# Allegro board asq1_button.brd
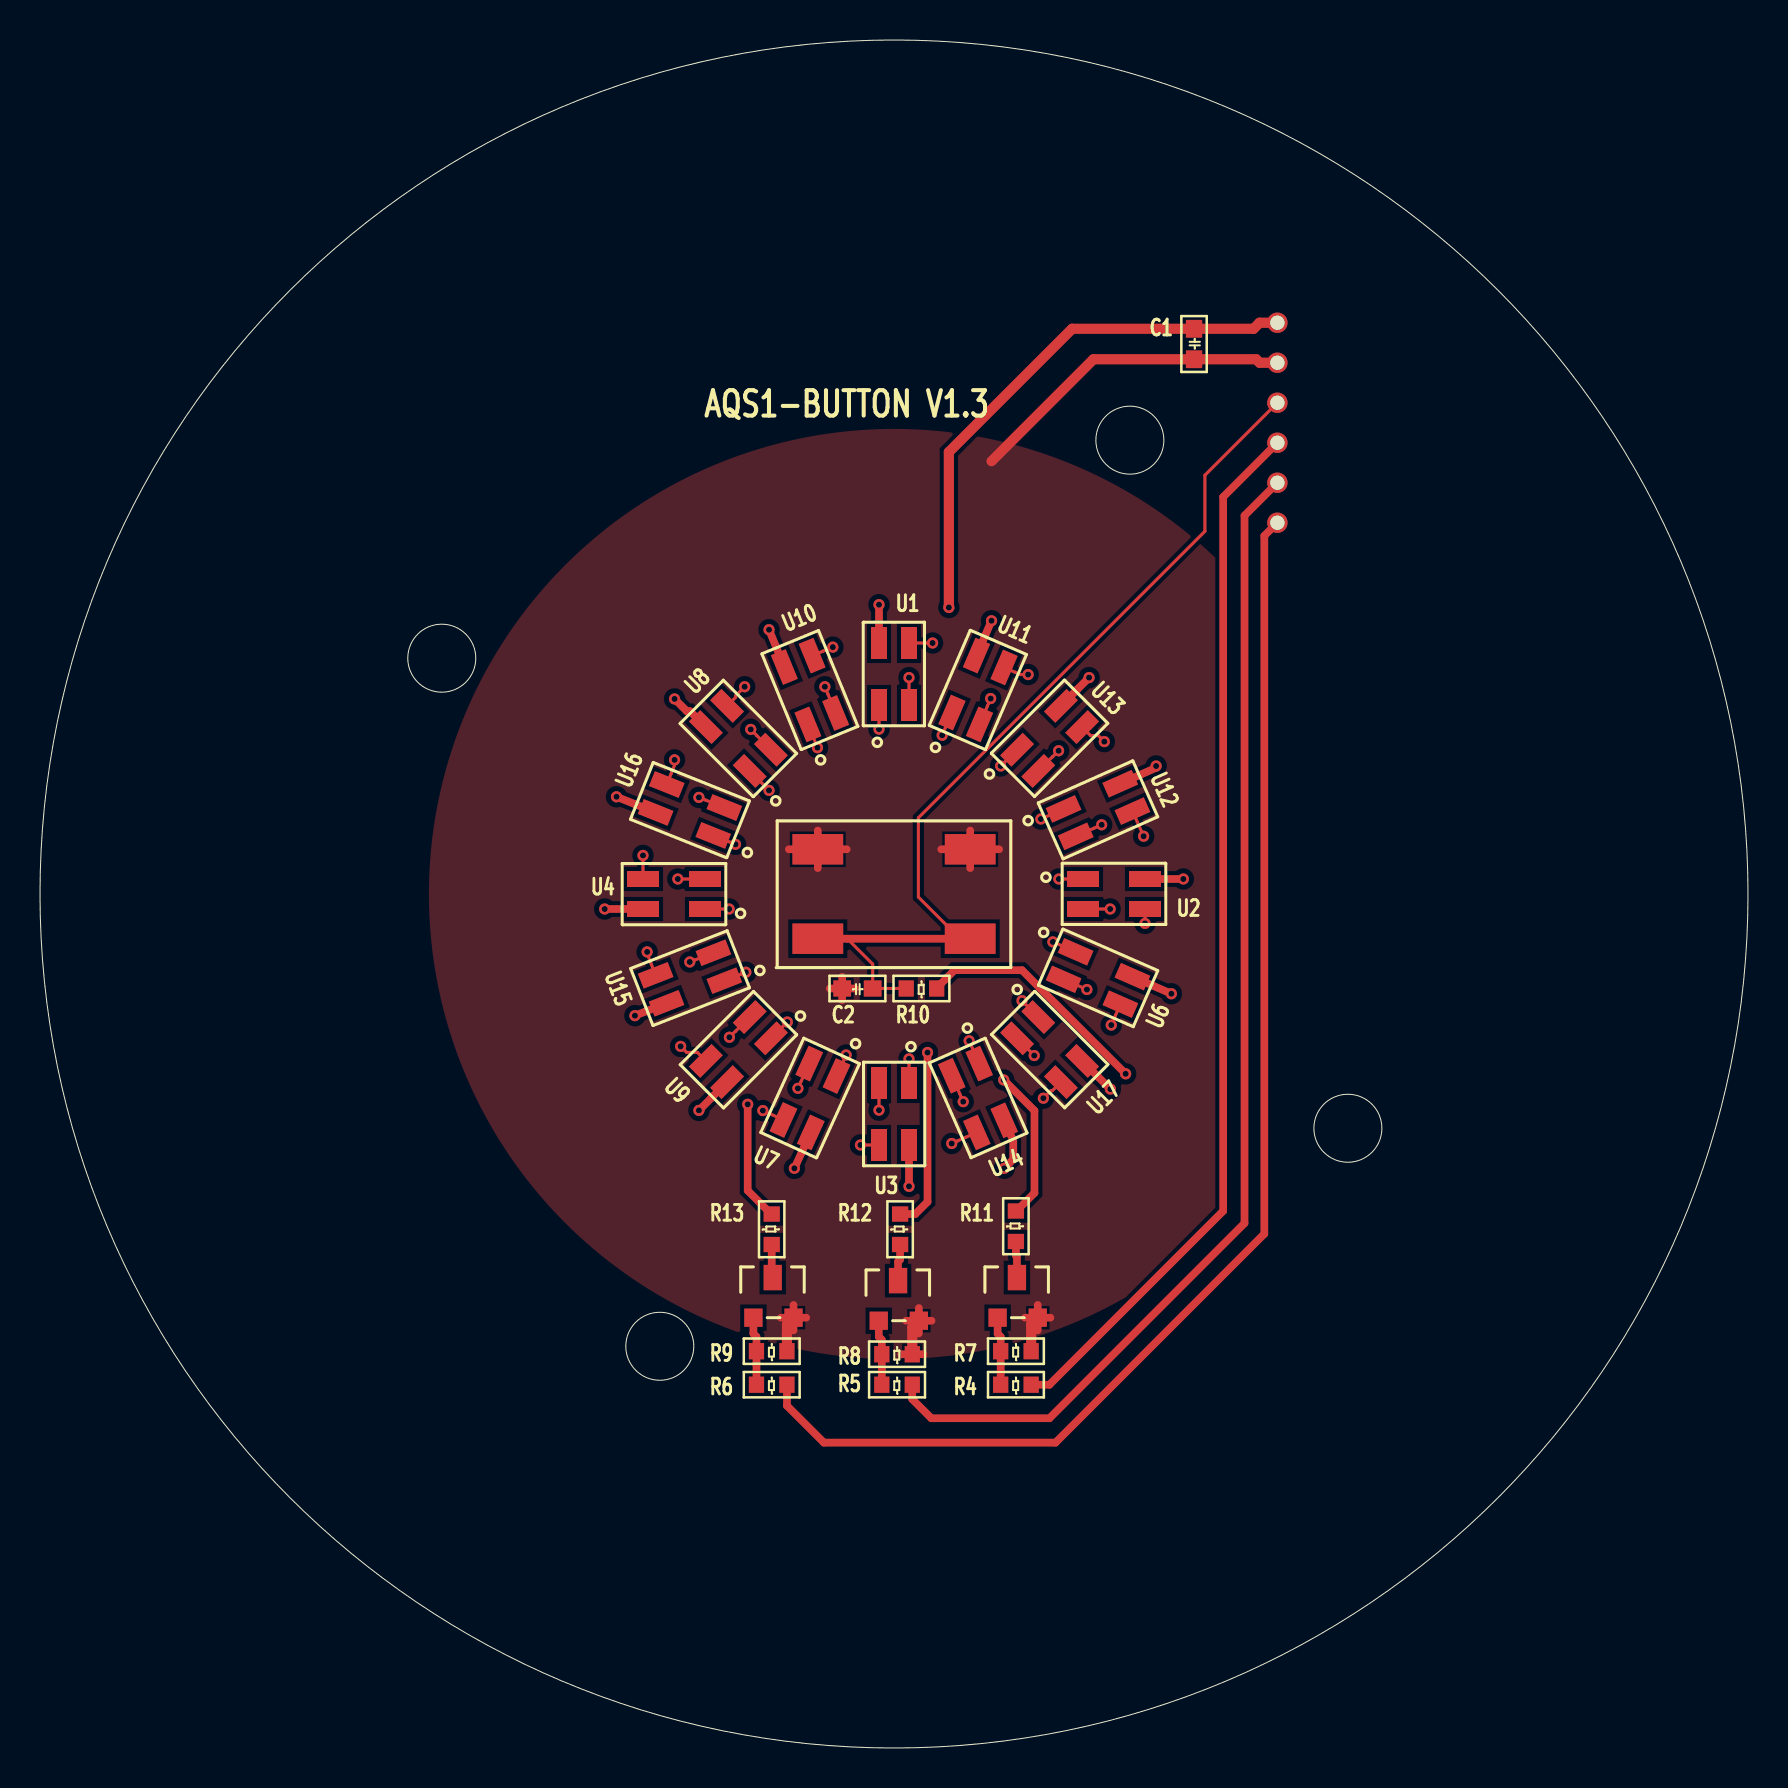
[diagram p0: board, top side]
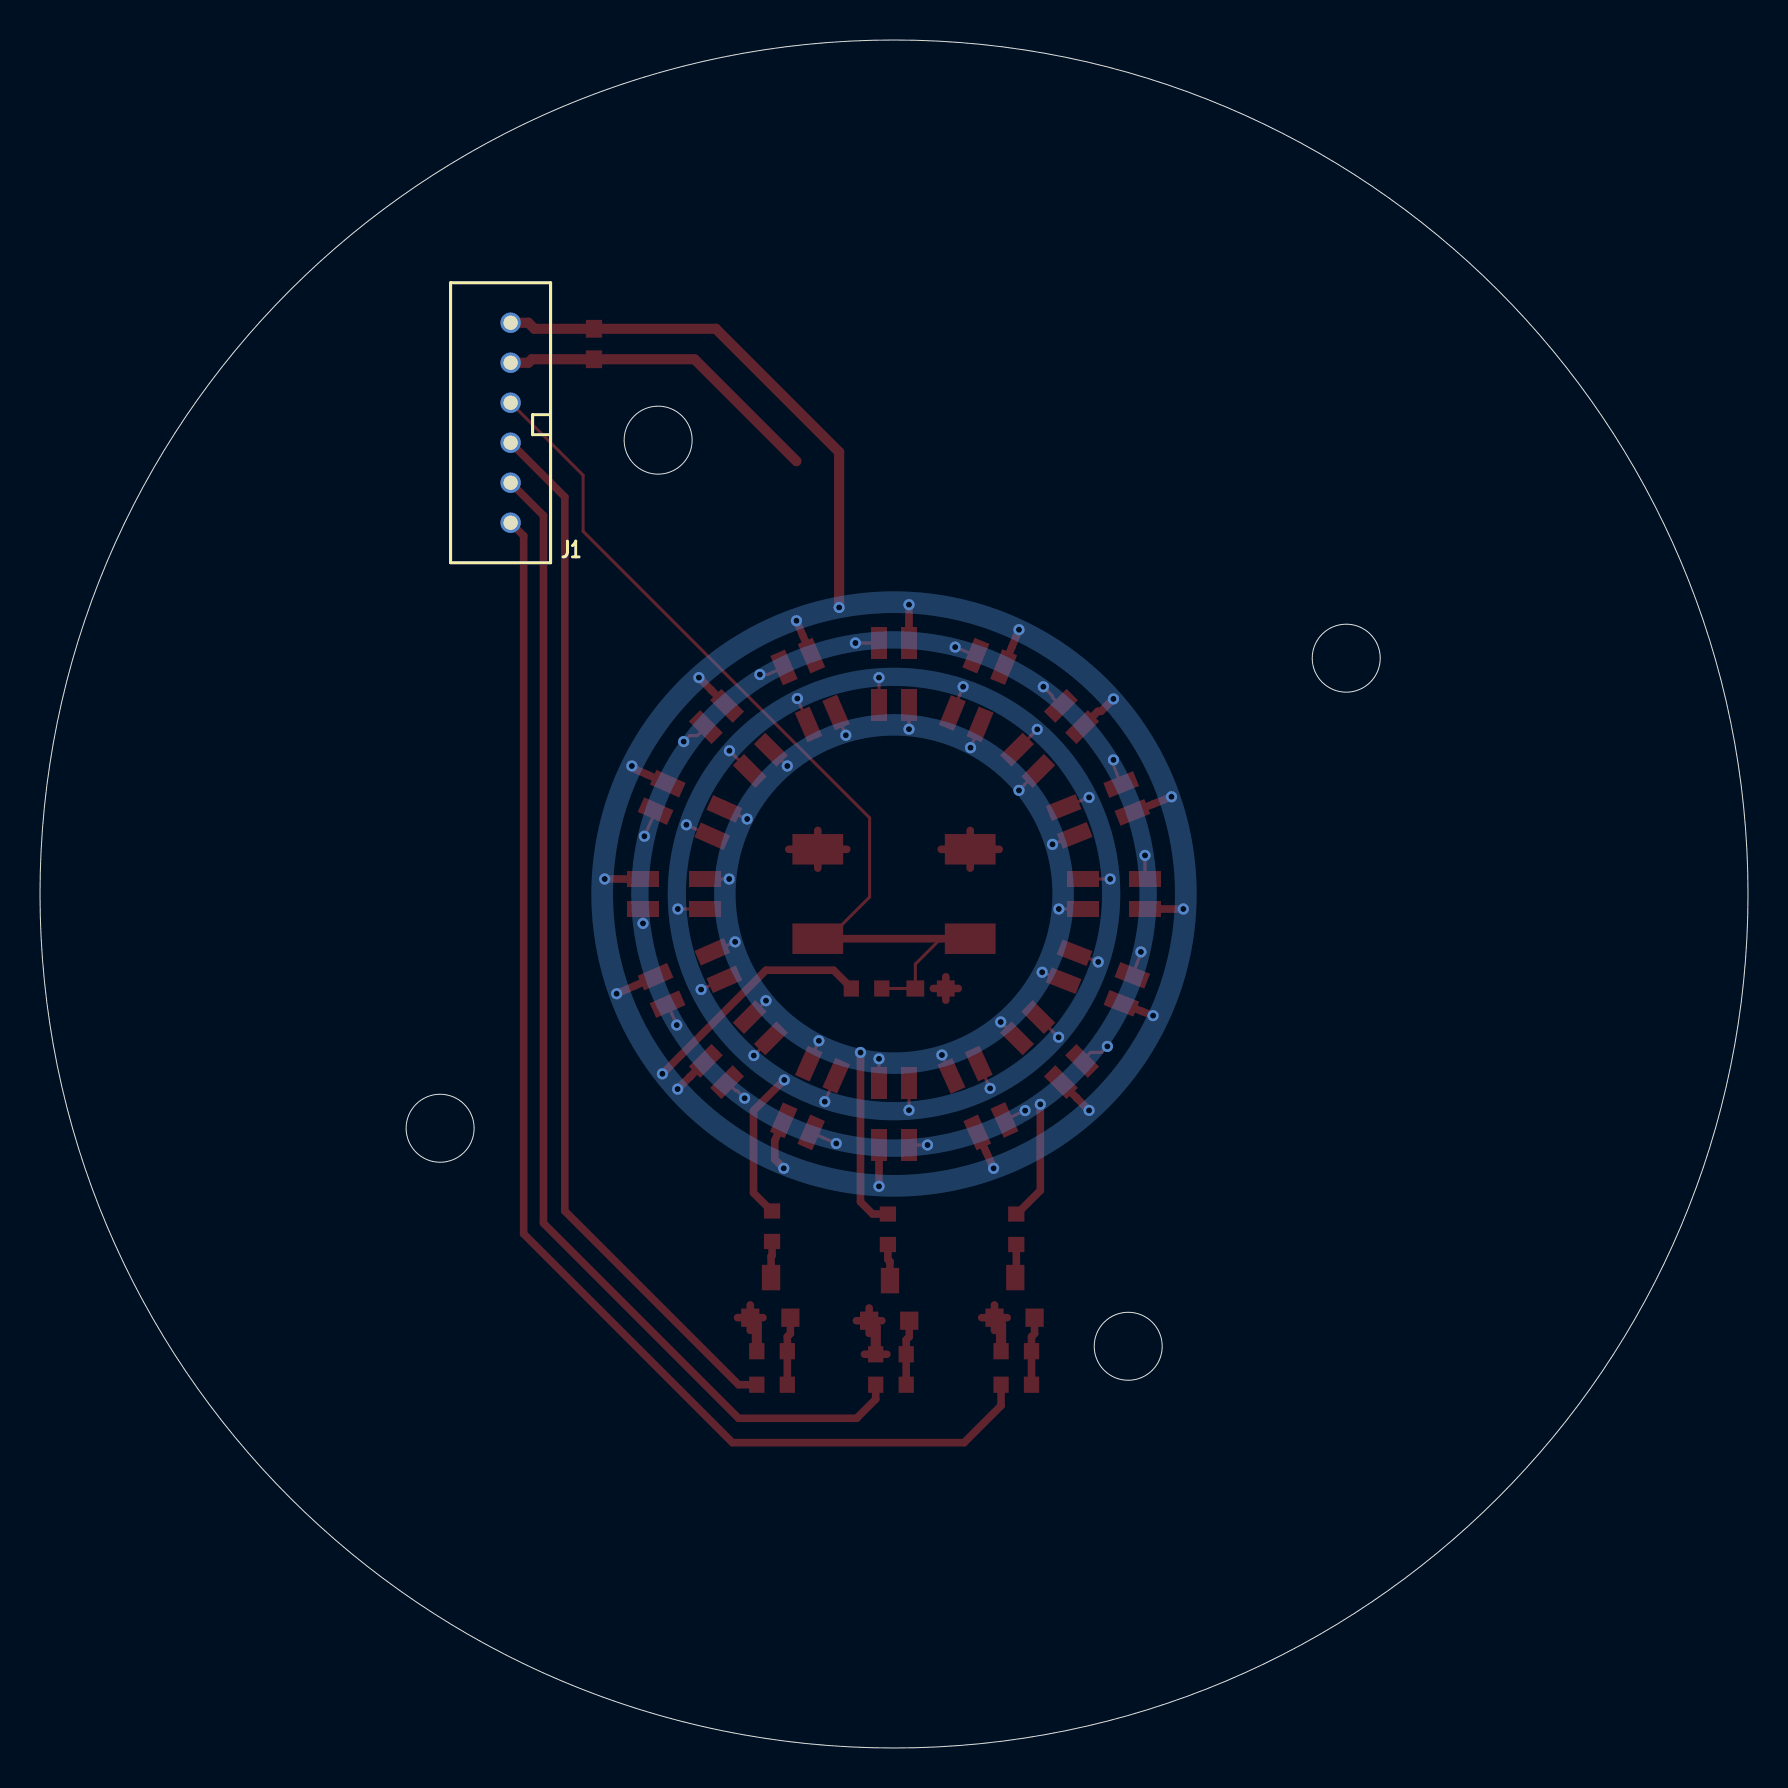
[diagram p1: board, bottom side, seen from below]

Outline 85.4 x 85.4 mm; copper layers: TOP, BOTTOM. Coordinates in mm from the lower left corner of the outline.
Outline path: circle c20.09,54.49 r1.7 ; circle c30.99,20.09 r1.7 ; circle c42.7,42.7 r42.7 ; circle c54.49,65.39 r1.7 ; circle c65.39,30.99 r1.7

## Design rules (mm)
nets with their own width: min track width 0.381; nets +3.3V GND

## Placement (name value [footprint] x y rotation side)
C1  0.1uF-SC0603  [SC0603]  57.7 70.2 270 top
C2  0.1uF-SC0603  [SC0603]  40.87 37.98 180 top
J1  J6x1  [CON6_2M]  65.37 59.26 180 bottom
Q1  cj3400  [SOT-23]  47.88 21.52 0 top
Q2  cj3400  [SOT-23]  41.94 21.36 0 top
Q3  cj3400  [SOT-23]  35.67 21.52 0 top
R4  2K-SR0603  [SR0603]  48.8 18.16 180 top
R5  2K-SR0603  [SR0603]  42.85 18.16 180 top
R6  2K-SR0603  [SR0603]  36.59 18.16 180 top
R7  10K-SR0603  [SR0603]  48.8 19.84 180 top
R8  10K-SR0603  [SR0603]  42.85 19.69 180 top
R9  10K-SR0603  [SR0603]  36.59 19.84 180 top
R10  10K-SR0603  [SR0603]  44.07 37.98 180 top
R11  120-SR0603  [SR0603]  48.8 26.09 90 top
R12  51-SR0603  [SR0603]  43 25.94 90 top
R13  51-SR0603  [SR0603]  36.59 25.94 90 top
U1  LED_3_3528  [LED_3528]  42.7 53.7 90 top
U2  LED_3_3528  [LED_3528]  53.7 42.7 0 top
U3  LED_3_3528  [LED_3528]  42.7 31.7 270 top
U4  LED_3_3528  [LED_3528]  31.7 42.7 180 top
U5  BUTTON  [SW-4]  42.7 42.7 90 top
U6  LED_3_3528  [LED_3528]  52.9 38.5 336.4 top
U7  LED_3_3528  [LED_3528]  38.5 32.5 245.5 top
U8  LED_3_3528  [LED_3528]  34.92 50.48 135 top
U9  LED_3_3528  [LED_3528]  34.92 34.92 225 top
U10  LED_3_3528  [LED_3528]  38.5 52.9 112.3 top
U11  LED_3_3528  [LED_3528#2]  46.9 52.9 66.7 top
U12  LED_3_3528  [LED_3528]  52.9 46.9 24 top
U13  LED_3_3528  [LED_3528]  50.48 50.48 45 top
U14  LED_3_3528  [LED_3528]  46.9 32.5 293.8 top
U15  LED_3_3528  [LED_3528#3]  32.5 38.5 201.4 top
U16  LED_3_3528  [LED_3528]  32.5 46.9 158.2 top
U17  LED_3_3528  [LED_3528]  50.48 34.92 315 top

## Library data of the parts
C1 C2 = CAP NP
J1 = J6x1
Q1-Q3 = NMOS
R4-R13 = R
U1-U4 U6-U17 = LED_3_3528
U5 = BUTTON

## Footprints (pads in the part's own frame, mm; a bottom-side part is the same pattern mirrored in y, then rotated)
CON6_2M
  round 1.016 hole 0.711: 1(3.5,2) 2(3.5,4) 3(3.5,6) 4(3.5,8) 5(3.5,10) 6(3.5,12)
LED_3528
  rect 1.6x0.8 smd: 1(-1.55,0.75) 2(1.55,0.75) 3(-1.55,-0.75) 4(1.55,-0.75)
LED_3528#2
  rect 1.6x0.8 smd: 1(-1.55,0.75) 2(1.55,0.75) 3(-1.55,-0.75) 4(1.55,-0.75)
LED_3528#3
  rect 1.6x0.8 smd: 1(-1.55,0.75) 2(1.55,0.75) 3(-1.55,-0.75) 4(1.55,-0.75)
SC0603
  rect 0.889x0.813 smd: 1(-0.762,0) 2(0.762,0)
SOT-23
  rect 0.914x0.914 smd: 1(0,0) 2(2.005,0)
  rect 0.914x1.27 smd: 3(0.965,2.005)
SR0603
  rect 0.762x0.813 smd: 1(-0.762,0) 2(0.762,0)
SW-4
  rect 1.524x2.54 smd: 1(-2.235,3.81) 2(2.235,3.81) 3(-2.235,-3.81) 4(2.235,-3.81)

## Nets
+3.3V: C1.1 J1.6 R10.1 U1.2(VCC) U2.2(VCC) U3.2(VCC) U4.2(VCC) U6.2(VCC) U7.2(VCC) U8.2(VCC) U9.2(VCC) U10.2(VCC) U11.2(VCC) U12.2(VCC) U13.2(VCC) U14.2(VCC) U15.2(VCC) U16.2(VCC) U17.2(VCC)
GND: C1.2 C2.2 J1.5 Q1.2(S) Q2.2(S) Q3.2(S) R7.1 R8.1 R9.1 U5.2 U5.4
B_CTRL: R13.2 U1.4(B) U2.4(B) U3.4(B) U4.4(B) U6.4(B) U7.4(B) U8.4(B) U9.4(B) U10.4(B) U11.4(B) U12.4(B) U13.4(B) U14.4(B) U15.4(B) U16.4(B) U17.4(B)
G_CTRL: R11.2 U1.3(G) U2.3(G) U3.3(G) U4.3(G) U6.3(G) U7.3(G) U8.3(G) U9.3(G) U10.3(G) U11.3(G) U12.3(G) U13.3(G) U14.3(G) U15.3(G) U16.3(G) U17.3(G)
ID_BUTTON: C2.1 J1.4 R10.2 U5.1 U5.3
IO4: J1.1 R6.1
IO12: J1.2 R5.1
IO15: J1.3 R4.1
R_CTRL: R12.2 U1.1(R) U2.1(R) U3.1(R) U4.1(R) U6.1(R) U7.1(R) U8.1(R) U9.1(R) U10.1(R) U11.1(R) U12.1(R) U13.1(R) U14.1(R) U15.1(R) U16.1(R) U17.1(R)
N606130: Q1.1(G) R4.2 R7.2
N606922: Q2.1(G) R5.2 R8.2
N607191: Q3.1(G) R6.2 R9.2
N623002: Q1.3(D) R11.1
N623454: Q2.3(D) R12.1
N623624: Q3.3(D) R13.1

## Via types
v1: diameter 0.559, hole 0.305, TOP to BOTTOM, 69 vias

## Routing (per net, layer and track width the routed paths; a pad name or vN(x,y) marks a point on that pad's centre or on a via; arc(x,y) is an arc through that point)
+3.3V: length 71.4
  TOP w0.381: U12.2 55.81,49.01 v1(55.81,49.1) ; v1(31.73,52.45) 32.34,51.84 32.5,51.84 U8.2 ; U7.2 38.07,29.76 v1(37.72,28.98) ; v1(48.21,28.98) 48.66,29.44 48.66,30.36 48.21,31.39 ; U6.2 v1(56.57,37.71) ; U13.2 51.84,52.9 51.84,52.9 v1(52.45,53.52) ; U16.2 29.74,47.19 v1(28.83,47.56) ; U17.2 52.9,33.56 52.9,33.56 v1(53.52,32.95) ; v1(29.75,36.62) 30.29,36.83 U15.2 ; v1(32.95,31.88) 33.56,32.5 33.56,32.5 U9.2 ; R10.1 44.83,38 45.72,38.89 49.1,38.89 v1(54.28,33.71) ; U1.2 v1(41.95,57.17) ; U2.2 v1(57.17,43.45) ; v1(36.45,55.91) U10.2 ; v1(47.58,56.36) 47.27,55.65 U11.2 ; U3.2 v1(43.45,28.08) ; U4.2 v1(28.23,41.95)
  TOP w0.508: J1.6 60.98,71.26 60.68,70.96 C1.1 51.61,70.96 45.44,64.8 v1(45.44,57.03)
GND: length 42.6
  TOP w0.381: 38.89,44 U5.2 ; U5.2 40.34,44.94 ; U5.2 37.44,44.94 ; U5.2 38.89,45.88 ; 37.68,20.88 Q3.2 ; Q3.2 37.04,21.52 ; Q3.2 38.31,21.52 ; Q3.2 37.68,22.15 ; C2.2 40.73,37.98 ; C2.2 39.49,37.98 ; C2.2 40.11,38.56 ; C2.2 40.11,37.39 ; 49.25,21.52 Q1.2 ; Q1.2 49.89,22.15 ; Q1.2 50.52,21.52 ; Q1.2 49.89,20.88 ; Q2.2 44.58,21.36 ; Q2.2 43.94,20.73 ; Q2.2 43.31,21.36 ; Q2.2 43.94,22 ; 43.06,19.69 R8.1 44.17,19.69 ; U5.4 46.51,45.88 ; U5.4 47.96,44.94 ; U5.4 46.51,44 ; U5.4 45.06,44.94
  TOP w0.508: 47.58,64.34 52.67,69.44 C1.2 60.81,69.44 60.98,69.26 J1.5 ; R7.1 49.56,21.19 Q1.2 ; Q2.2 43.61,21.04 R8.1 ; Q3.2 37.35,21.19 R9.1
B_CTRL: length 25.5
  TOP w0.152: v1(35.23,53.06) 34.78,52.61 34.78,52.53 U8.4 ; U2.4 v1(55.25,41.23) ; U3.4 v1(41.02,30.15) ; U10.4 v1(39.64,55.04) ; U17.4 50.62,32.87 50.55,32.87 v1(50.17,32.49) ; 54.62,46.84 54.87,46.29 v1(55.18,45.59) ; U6.4 53.78,36.64 v1(53.56,36.15) ; U16.4 31.73,49.14 v1(31.73,49.41) ; v1(32.03,35.08) 32.33,34.78 32.87,34.78 U9.4 ; U4.4 v1(30.15,44.63) ; U14.4 45.88,30.36 v1(45.59,30.23) ; v1(30.36,39.8) 30.36,39.73 U15.4 ; U1.4 v1(44.63,55.25) ; v1(36.14,31.87) U7.4 ; v1(53.22,50.32) 52.92,50.62 52.53,50.62 U13.4 ; v1(49.41,53.67) 49.02,53.67 U11.4
  TOP w0.381: R13.2 36.56,26.7 35.38,27.87 v1(35.38,32.18)
G_CTRL: length 29.5
  TOP w0.152: v1(37.9,32.98) 38.04,33.31 U7.3 ; U8.3 35.84,50.62 35.84,50.63 v1(35.54,50.93) ; v1(50.93,49.86) 50.63,49.56 50.62,49.56 U13.3 ; v1(39.24,53.06) 39.4,52.68 U10.3 ; U11.3 47.37,52.1 v1(47.53,52.47) ; U16.3 33.29,47.39 v1(32.95,47.53) ; U15.3 32.74,39.4 v1(32.49,39.3) ; v1(53.08,46.16) U12.3 ; v1(46.16,32.32) 45.99,32.7 45.59,33.62 ; U2.3 v1(53.51,41.95) ; v1(34.47,35.54) 34.77,35.84 34.78,35.84 U9.3 ; U3.3 v1(41.95,31.89) ; U1.3 v1(43.45,53.52) ; v1(52.35,37.92) U6.3 ; v1(49.71,34.62) 49.56,34.77 49.56,34.78 U17.3 ; U4.3 v1(31.89,43.45)
  TOP w0.381: v1(48.19,33.4) 49.72,31.87 49.72,27.75 48.82,26.85 R11.2
ID_BUTTON: length 47.4
  TOP w0.152: J1.4 58.24,63.64 58.24,60.84 43.92,46.51 43.92,42.55 46,40.46 ; R10.2 C2.1 41.63,39.19 40.36,40.46
  TOP w0.381: U5.3 U5.1
IO4: length 65.8
  TOP w0.381: R6.1 37.35,17.12 39.19,15.27 50.78,15.27 61.22,25.71 61.22,60.61 J1.1
IO12: length 59.5
  TOP w0.381: R5.1 43.61,17.44 44.57,16.49 50.47,16.49 60.23,26.24 60.23,61.62 J1.2
IO15: length 52.7
  TOP w0.381: R4.1 50.47,18.16 59.16,26.85 59.16,62.55 J1.3
R_CTRL: length 28.5
  TOP w0.152: U4.1 v1(34.46,41.95) ; v1(49.1,37.37) 49.2,37.26 49.2,37.26 U17.1 ; 38.4,51.18 38.78,50.25 v1(38.87,50.02) ; U16.1 34.59,45.26 v1(34.78,45.18) ; U9.1 36.55,35.49 v1(37.37,36.3) ; v1(50.64,40.31) U6.1 ; v1(48.03,49.1) 48.14,49.2 48.14,49.2 U13.1 ; v1(35.29,38.79) U15.1 ; v1(40.31,34.65) U7.1 ; v1(36.45,47.88) 36.2,48.14 36.2,48.14 U8.1 ; v1(45.11,50.64) U11.1 ; U3.1 v1(43.45,34.46) ; U1.1 v1(41.95,50.94) ; v1(50.04,46.45) 51.18,46.96 ; U2.1 v1(50.94,43.45) ; v1(46.46,35.36) U14.1
  TOP w0.381: R12.2 43.77,26.7 44.38,27.31 v1(44.38,34.78)
N606130: length 3.4
  TOP w0.381: R4.2 R7.2 48.03,20.56 47.88,20.72 Q1.1
N606922: length 3.3
  TOP w0.381: R5.2 R8.2 42.09,20.41 41.94,20.56 Q2.1
N607191: length 3.4
  TOP w0.381: R6.2 R9.2 35.82,20.56 35.67,20.72 Q3.1
N623002: length 1.8
  TOP w0.381: Q1.3 48.85,24.58 48.8,24.63 R11.1
N623454: length 1.8
  TOP w0.381: Q2.3 42.9,24.32 43,24.42 R12.1
N623624: length 1.7
  TOP w0.381: R13.1 36.59,23.57 Q3.3

## Copper pours and planes (outline as drawn; the poured copper is in the pictures)
+3.3V on BOTTOM: 42.7,27.57 42.7,57.83 ; 1 cut-out
GND on TOP: 42.7,65.96 42.7,19.44 ; 3 cut-outs
B_CTRL on BOTTOM: 42.7,29.56 42.7,55.84 ; 1 cut-out
G_CTRL on BOTTOM: 42.7,31.39 42.7,54.01 ; 1 cut-out
R_CTRL on BOTTOM: 42.7,33.71 42.7,51.69 ; 1 cut-out

## Text on the board
Ref Des/Silkscreen Top: AQS1-BUTTON V1.3
NCLEGEND-1-2: FIGURE | SIZE | 0.3048 | 0.7112 | DRILL CHART: TOP to BOTTOM | ALL UNITS ARE IN MILLIMETERS | PLATED | QTY | 69 | 6
